# Altium PCB FPv1.3.5.PcbDoc (part 1 of 9)
Units mil, origin at the board's own origin, x right, y up, seen from the top; angles counter-clockwise.
Board outline 3200 x 2100 mil, 4 copper layers (Top Layer, GROUND PLANE, POWER PLANE, Bottom Layer); 98 components, 183 nets, 614 pads, 312 vias.
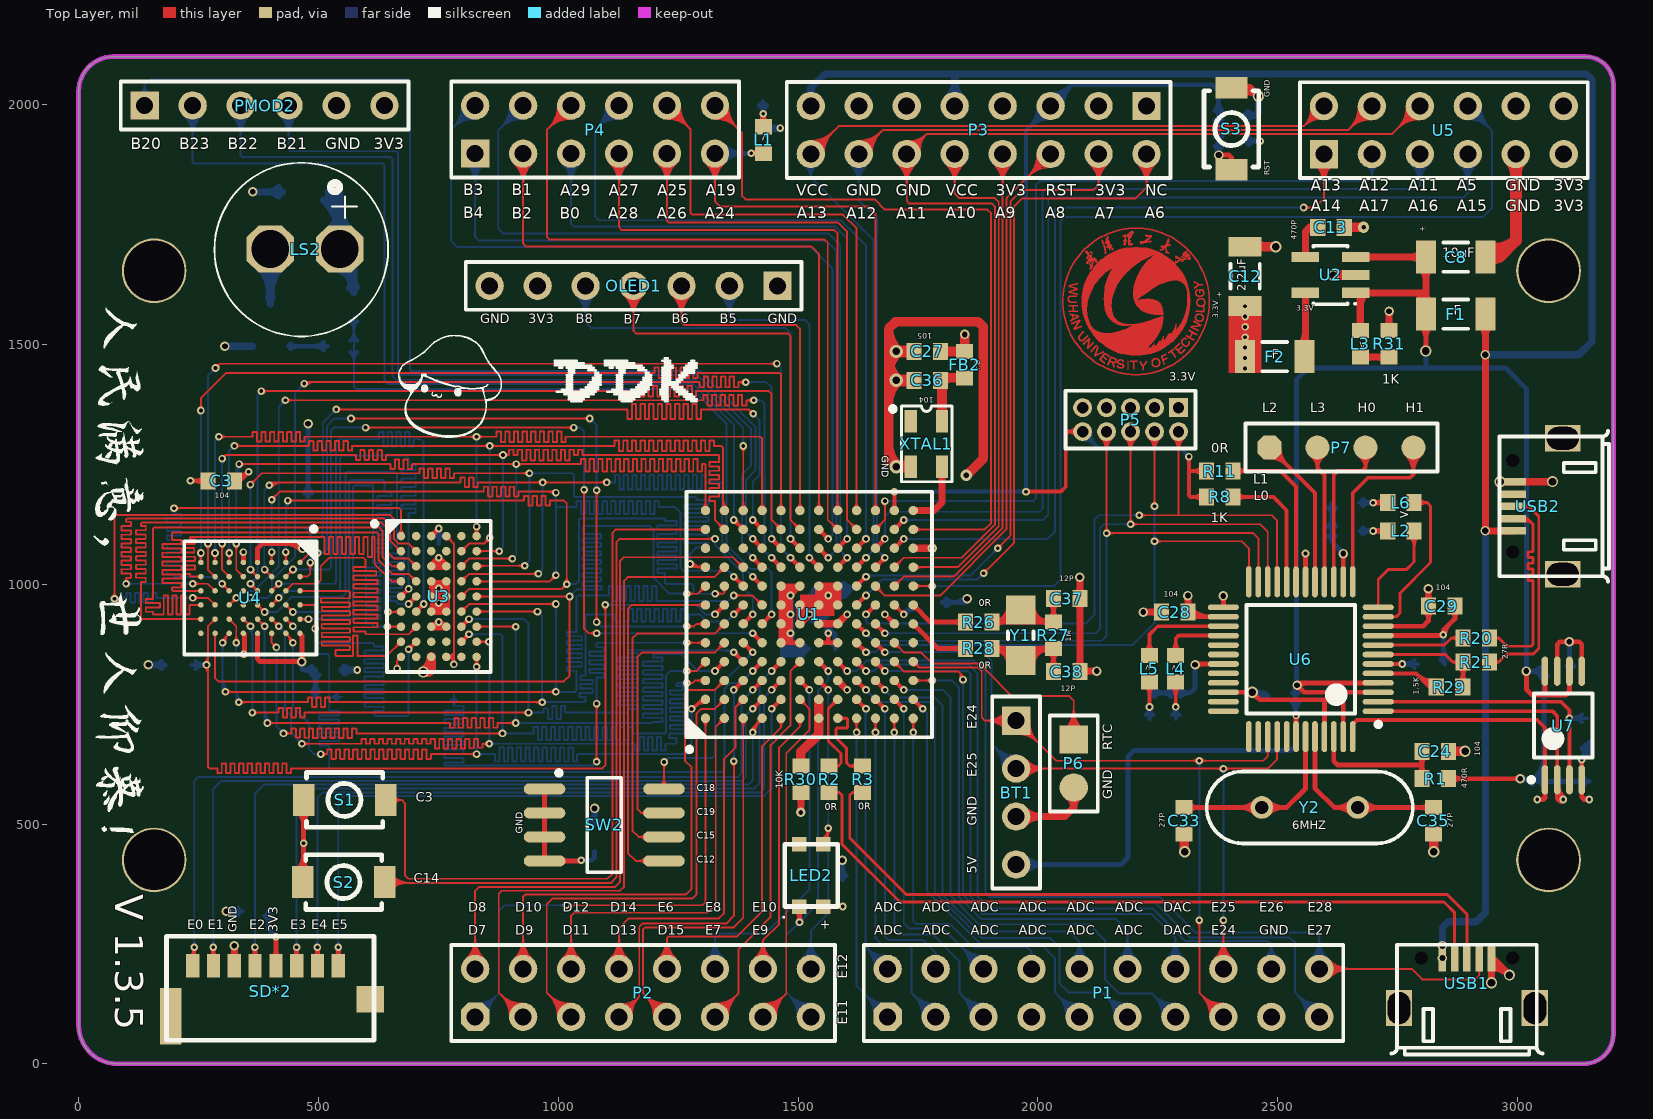
[diagram p0: Top Layer view]
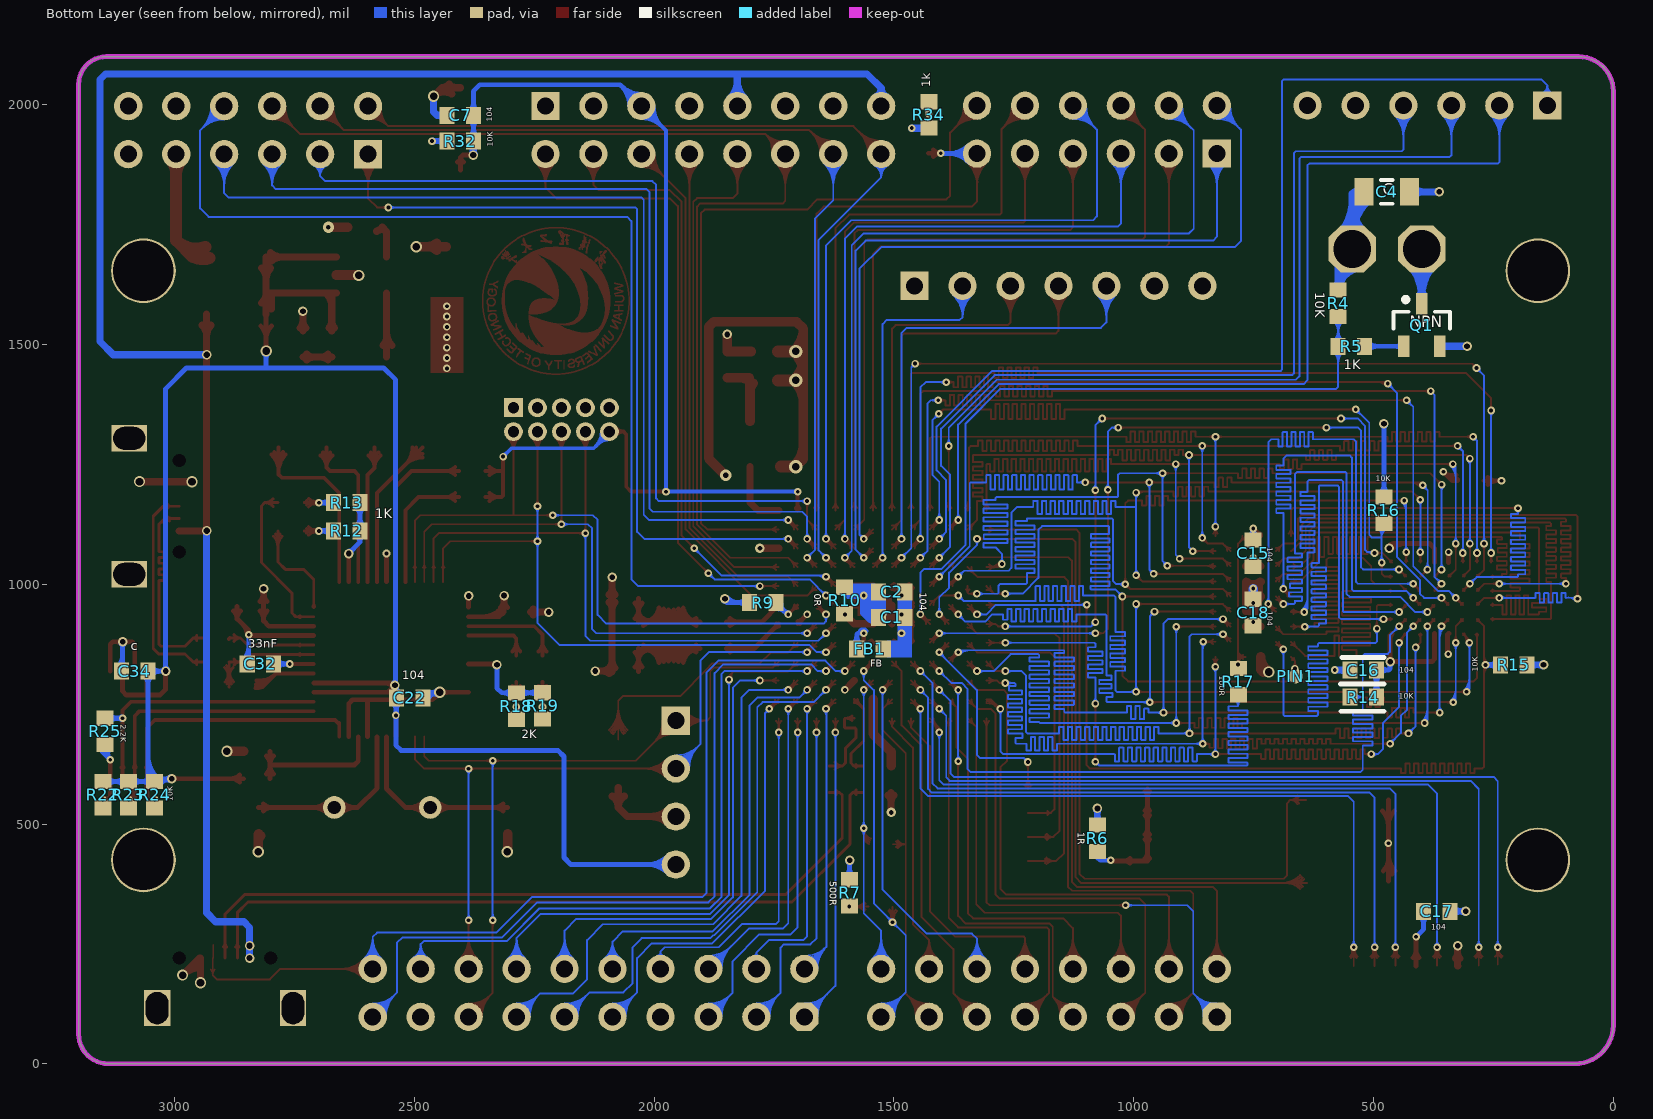
[diagram p1: Bottom Layer view, seen from below]
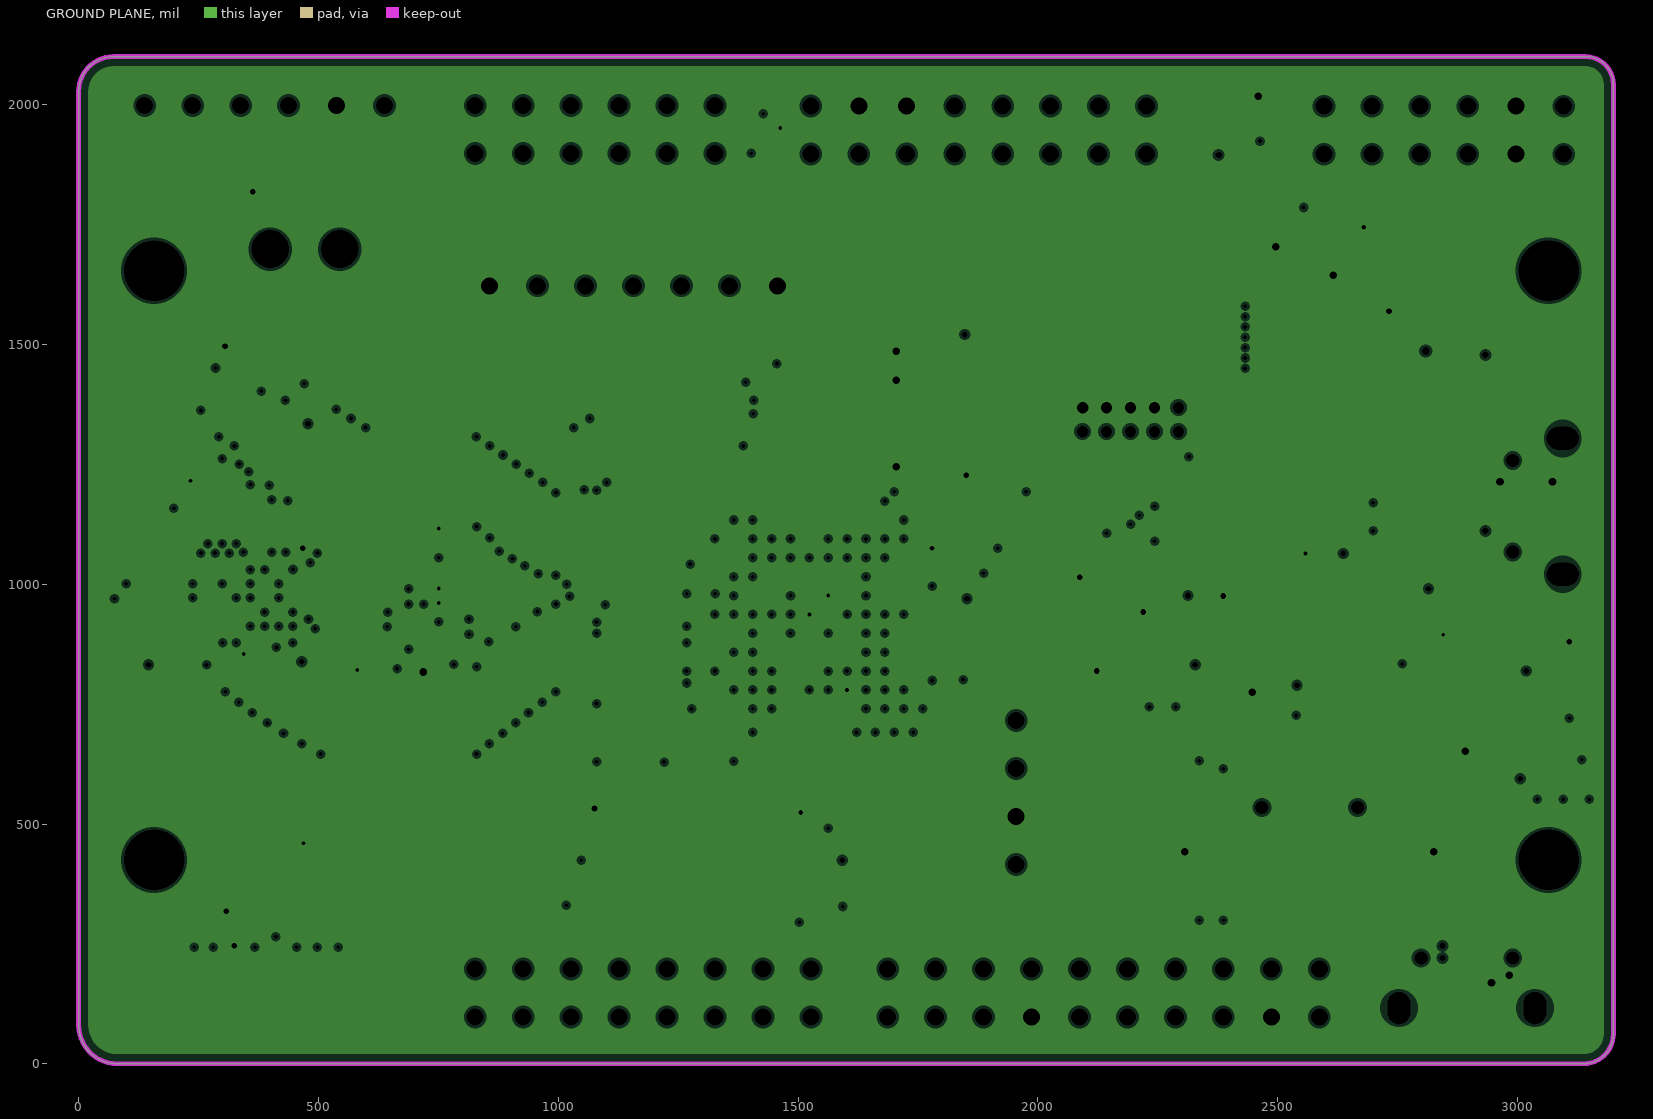
[diagram p2: GROUND PLANE, clearances drawn from the general rule]
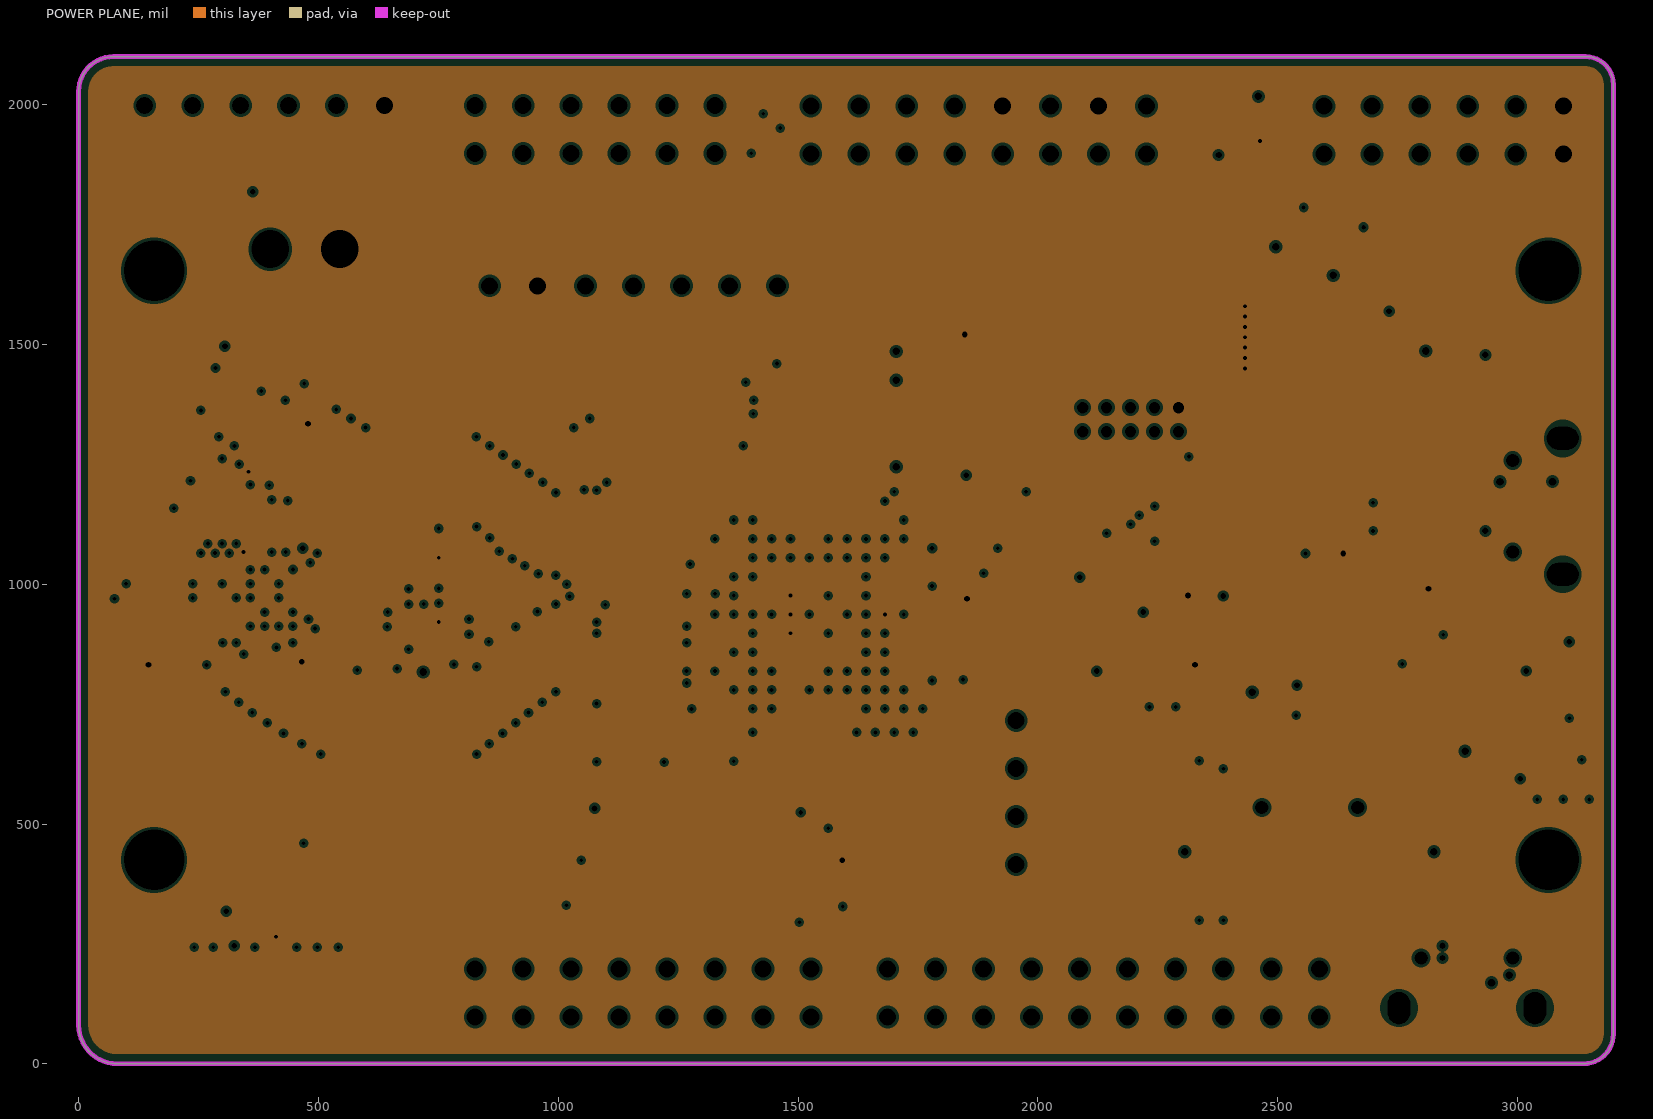
[diagram p3: POWER PLANE, clearances drawn from the general rule]

## Layer stack, top to bottom
Top Layer: signal copper 1.4
Dielectric: prepreg 12.6, FR-4, Dk 4.8
GROUND PLANE: plane copper 1.4, net GND
Dielectric: core 12.6, FR-4, Dk 4.8
POWER PLANE: plane copper 1.4, net 3.3V
Dielectric: prepreg 12.6, FR-4, Dk 4.8
Bottom Layer: signal copper 1.4

## Board outline
0,80.71 0,2027.56 cw(c72.44,2027.56) 72.44,2100 3142.13,2100 cw(c3142.13,2042.13) 3200,2042.13 3200,62.2 cw(c3137.8,62.2) 3137.8,0 80.71,0 cw(c80.71,80.71)

## Design rules (kind name [scope] priority, off if disabled: settings)
Clearance [All] p1: gap=4
DiffPairsRouting [All] p1: maxlimit=100 minlimit=4 mostfreqgap=10 bottomlayer_maxgap=50 maxuncoupledlength=500
HoleSize [All] p1: absolutevalues=TRUE maxlimit=500 minlimit=7.87 maxpercent=80.000 minpercent=20.000
PlaneClearance [All] p1: clearance=6
PlaneConnect PlaneConnect_1 [All] p1: planeconnectstyle=Direct reliefexpansion=4 reliefentries=4 reliefconductorwidth=6 reliefairgap=10
PolygonConnect [All] p1: connectstyle=Direct reliefconductorwidth=10 reliefentries=4 polygonreliefangle="90 Angle" airgapwidth=5
RoutingVias [All] p1: holewidth=28 width=50 viastyle="Through Hole" minholewidth=28 minwidth=50 maxholewidth=28 maxwidth=50
SilkToSilkClearance [All] p1: silktosilkclearance=0
SilkToSolderMaskClearance [IsPad] p1: minsilkscreentomaskgap=0 clearancetoexposedcopper=TRUE
SolderMaskExpansion [All] p1: expansion=4
Width [All] p1: maxlimit=70 minlimit=4 preferedwidth=10 minimp=50.000000 maximp=50.000000 favimp=50.000000
22 further rules are at their usual default settings.

## Classes and differential pairs
net class PTC[19..12]: PTC3 PTC12 PTC13 PTC14 PTC15 PTC18 PTC19
net class PTD[15..7]: PTD7 PTD8 PTD9 PTD10 PTD11 PTD12 PTD13 PTD14 PTD15
net class PTB[23..0]: PTB0 PTB1 PTB2 PTB3 PTB4 PTB5 PTB6 PTB7 PTB8 PTB20 PTB21 PTB22 PTB23
net class PTA[29..11]: PTA4 PTA5 PTA11 PTA12 PTA13 PTA14 PTA15 PTA16 PTA17 PTA24 PTA25 PTA26 PTA27 PTA28 PTA29
net class FTM3_CH[7..1]: FTM3_CH1 FTM3_CH2 FTM3_CH3 FTM3_CH4 FTM3_CH5 FTM3_CH6 FTM3_CH7
net class ANALOG[13..1]: ANALOG1 ANALOG2 ANALOG3 ANALOG4 ANALOG5 ANALOG6 ANALOG7 ANALOG8 ANALOG9 ANALOG10 ANALOG11 ANALOG12 ANALOG13
from-to class SRAM_DATA: AD0(U1-B2:U4-B6) AD1(U1-A2:U4-C5) AD2(U1-A3:U4-C6) AD3(U1-B3:U4-D5) AD4(U1-C3:U4-E5) AD5(U1-C6:U4-F5) AD6(U1-D6:U4-F6) AD7(U1-A7:U4-G6) AD8(U1-B7:U4-B1) AD9(U1-C7:U4-C1) AD10(U1-D7:U4-C2) AD11(U1-A8:U4-D2) AD12(U1-C8:U4-E2) AD13(U1-D8:U4-F2) AD14(U1-B9:U4-F1) AD15(U1-D9:U4-G1) "AD16 (U1-E9 : U4-F4)" AD17(U1-B10:U4-E4) AD18(U1-C10:U4-D3) AD19(U1-D10:U4-H1) AD20(U1-E10:U4-G2)
component class MCU_K64FX: C1 C2 C3 C7 C27 C36 C37 C38 FB1 FB2 P5 P6 R9 R10 R26 R27 R28 R30 R32 S1 S2 S3 U1 XTAL1 Y1
component class Memory: C15 C16 C17 C18 PIN1 R14 R15 R16 R17 U3 U4
component class power_manage: C8 C12 C13 F1 F2 L3 R31 U2
component class protocol1: BT1 C4 L1 LED2 LS2 OLED1 P1 P2 P3 P4 PMOD2 Q1 R2 R3 R4 R5 R6 R7 R34 SD*2 SW2 U5 USB1
component class protocol2: C22 C24 C28 C29 C32 C33 C34 C35 L2 L4 L5 L6 P7 R1 R8 R11 R12 R13 R18 R19 R20 R21 R22 R23 R24 R25 R29 U6 U7 USB2 Y2
net class AD[20..0]: AD0 AD1 AD2 AD3 AD4 AD5 AD6 AD7 AD8 AD9 AD10 AD11 AD12 AD13 AD14 AD15 AD16 AD17 AD18 AD19 AD20
net class PTE[0..28]: PTE0 PTE1 PTE2 PTE3 PTE4 PTE5 PTE24 PTE25 PTE26 PTE27 PTE28
differential pair USB0D: +USB0D_P -USB0D_N
differential pair USB1D: +USB1D_P -USB1D_N
differential pair USBPD: +USBPD_P -USBPD_N
differential pair USB0R: +USB0R_P -USB0R_N

## Components (designator, comment, footprint, x,y, rotation, side; value= is the part's Value field where it differs from the comment)
BT1 "Header 4" HDR1X4#1 1954.72,715.55 r270 top
C1 "Cap" 1608[0603] 1505,931 r180 bottom
C2 "Cap" 1608[0603] 1505,984 r180 bottom
C3 "Cap" 1608[0603] 297.24,1215.55 r0 top
C4 "Cap" C2012 472.44,1817.91 r0 bottom
C7 "Cap" 1608[0603] 2404.53,1977.36 r180 bottom
C8 "Cap Pol1" 1206(2) 2871.06,1682.09 r0 top
C12 "Cap Pol1" 1206(2) 2432.09,1641.73 r90 top
C13 "Cap" 1608[0603] 2611.22,1744.09 r180 top
C15 "Cap" 1608[0603] 750.98,1064.96 r270 bottom
C16 "Cap" 1608[0603] 521.65,820.87 r180 bottom
C17 "Cap" 1608[0603] 368.11,317.91 r0 bottom
C18 "Cap" 1608[0603] 750.98,940.94 r270 bottom
C22 "Cap" 1608[0603] 2509.84,762.8 r0 bottom
C24 "Cap" 1608[0603] 2828.74,651.57 r0 top
C27 "Cap" 1608[0603] 1769.69,1485.24 r0 top
C28 "Cap" 1608[0603] 2285.43,941.93 r0 top
C29 "Cap" 1608[0603] 2842.02,954.18 r180 top
C32 "Cap" 1608[0603] 2820.87,833.66 r0 bottom
C33 "Cap" 1608[0603] 2305.12,506.89 r90 top
C34 "Cap" 1608[0603] 3082.84,818.54 r180 bottom
C35 "Cap" 1608[0603] 2824.8,506.89 r270 top
C36 "Cap" 1608[0603] 1769.69,1425.2 r0 top
C37 "Cap" 1608[0603] 2060.04,970.08 r180 top
C38 "Cap" 1608[0603] 2060.04,817.52 r180 top
F1 "300-500mA" 1206(2) 2871.06,1562.99 r180 top
F2 "300-500mA" 1206(2) 2494.09,1474.41 r180 top
FB1 "Inductor" 1608[0603] 1550,865 r0 bottom
FB2 "Inductor" 1608[0603] 1847.44,1457.68 r270 top
L1 "LED" 1608[0603] 1428.15,1926.18 r90 top
L2 "LED" 1608[0603] 2757,1111 r0 top
L3 "LED" 1608[0603] 2672.24,1500.98 r270 top
L4 "LED" 1608[0603] 2287.4,823.82 r90 top
L5 "LED" 1608[0603] 2232.64,823.98 r90 top
L6 "LED" 1608[0603] 2757,1170 r0 top
LED2 "RGB_LED1206" RGB 1527.56,392.72 r90 top
LS2 "Bell" BZ 464.57,1698.82 r270 top
OLED1 "Header 7" HDR1X7 1457,1622 r180 top
P1 "Header 10X2" HDR2X10 1686.81,97.83 r0 top
P2 "Header 8X2" HDR2X8#1 826.81,97.83 r0 top
P3 "Header 8X2" HDR2X8#2 2226.61,1997.05 r180 top
P4 "Header 6X2" HDR2X6 826.81,1897.83 r0 top
P5 "JTAG" MHDR2X5 2293.31,1368.11 r180 top
P6 "Header 2" HDR1X2 2074.8,676.18 r270 top
P7 "Header 4" HDR1X4#2 2483,1285 r0 top
PIN1 "PIN" PIN 662,808 r180 bottom
PMOD2 "Header 6" HDR1X6 137.8,1998.03 r0 top
Q1 "QNPN" SOT23_N 399.61,1540.35 r90 bottom
R1 "Res" 1608[0603] 2828.74,594.49 r180 top
R2 "Res" 1608[0603] 1564.96,593.5 r270 top
R3 "Res" 1608[0603] 1634.84,593.5 r270 top
R4 "10k" 1608[0603] 573.82,1585.63 r270 bottom
R5 "Res2" 1608[0603] 546.26,1496.06 r0 bottom
R6 "Res2" 1608[0603] 1075.79,470.47 r270 bottom
R7 "Res" 1608[0603] 1592.52,356.3 r90 bottom
R8 "Res" 1608[0603] 2379,1182 r0 top
R9 "Res" 1608[0603] 1773.62,961.61 r180 bottom
R10 "Res" 1608[0603] 1603,966 r270 bottom
R11 "Res" 1608[0603] 2379,1236 r0 top
R12 "Res" 1608[0603] 2641,1111 r180 bottom
R13 "Res" 1608[0603] 2641,1170 r180 bottom
R14 "Res" 1608[0603] 521.65,764.76 r180 bottom
R15 "Res" 1608[0603] 207.68,831.69 r180 bottom
R16 "Res" 1608[0603] 478.35,1154.53 r90 bottom
R17 "Res" 1608[0603] 782,797 r90 bottom
R18 "Res" 1608[0603] 2287.4,745.94 r90 bottom
R19 "Res" 1608[0603] 2232.64,746.1 r90 bottom
R20 "Res" 1608[0603] 2914.37,887.8 r180 top
R21 "Res" 1608[0603] 2914.37,837.6 r180 top
R22 "Res" 1608[0603] 3149.61,561.02 r270 bottom
R23 "Res" 1608[0603] 3096.46,561.02 r270 bottom
R24 "Res" 1608[0603] 3041.34,561.02 r270 bottom
R25 "Res" 1608[0603] 3144.69,692.91 r270 bottom
R26 "Res" 1608[0603] 1877.13,920.94 r180 top
R27 "Res" 1608[0603] 2032.48,893.31 r270 top
R28 "Res" 1608[0603] 1877.13,865.94 r180 top
R29 "Res" 1608[0603] 2858.27,785.43 r180 top
R30 "Res" 1608[0603] 1505.91,593.5 r90 top
R31 "Res" 1608[0603] 2732.28,1500.98 r270 top
R32 "Res" 1608[0603] 2404.29,1923.78 r180 bottom
R34 "Res" 1608[0603] 1427.17,1978.35 r90 bottom
S1 "SW-PB" "key 3*4*2" 554.13,550.2 r180 top
S2 "SW-PB" "key 3*4*2" 552.17,378.94 r180 top
S3 "SW-PB" "key 3*4*2" 2403.54,1948.82 r270 top
SD*2 "TF_card" TF卡座(短体) 183.07,49.21 r0 top
SW2 "SW DIP-4" SOIC-8 1096,498 r0 top
U1 "MK64BGA144" BGA144C100P12X12_1300X1300X161 1523.62,937.01 r90 top
U2 "MIC5219" SOT-23-5 2610.24,1644.69 r90 top
U3 "SN74LVC16373A(BGA54)" BGA54C80P6X9_550X800X120 750.98,974.41 r0 top
U4 "EM7164SU16" BGA48C75P6X8_598X698X104 358.27,971.46 r270 top
U5 "Header 6X2" HDR2X6 2596.46,1896.65 r0 top
U6 "FT2232D" TSQFP50P900X900X160-48N 2548.23,843.5 r180 top
U7 "AT93C46D" TSOP65P640X120-8N-AT93C46D 3095.63,705.35 r90 top
USB1 "USB_5line" USB-MICRO-5P-2F#1 2843.5,220.47 r180 top
USB2 "USB_5line" USB-MICRO-5P-2F#2 2990.16,1111.22 r270 top
XTAL1 "50M有源晶体" XTAL7_3225 1767.72,1292.32 r270 top
Y1 "32.768kHZ" 3215 1964.57,893.31 r270 top
Y2 "6MHz" XTAL-RAD-0.2 2566.93,534.45 r180 top

## Footprints (in the part's own frame and the unit in brackets; to place one, negate y for a bottom-side part, rotate by r counter-clockwise, add the part's x,y. Pads: shape width x height; smd on the part's side, far side on the other; paste and mask are expansions set on the pad)
1206(2) [mm]
  rect 1.05x1.75 smd: 1(-1.575,0) 2(1.575,0)
  silkscreen extent -0.65,-0.77 0.65,0.77, body extent -1.6,-0.8 1.6,0.8, height 1.6
1608[0603] [mm] "Chip Capacitor, Body 1.6x0.8mm, IPC High Density"
  rect 0.8x0.9 smd: 1(-0.7,0) 2(0.7,0)
  body extent -0.87,-0.48 0.87,0.48, height 1.3
3215 [mm]
  rect 1.54x1.55 smd: 1(-1.335,0) 2(1.335,0)
  silkscreen extent -0.2,-0.67 0.2,0.67, body extent -1.65,-0.75 1.65,0.75, height 0.75
BGA48C75P6X8_598X698X104 [mm] "BGA, 48-Leads, Body 5.98x6.98mmx1.04mm, Pitch 0.75mm"
  round 0.29 smd: A1(-1.875,2.625) A2(-1.125,2.625) A3(-0.375,2.625) A4(0.375,2.625) A5(1.125,2.625) A6(1.875,2.625) B1(-1.875,1.875) B2(-1.125,1.875) B3(-0.375,1.875) B4(0.375,1.875) B5(1.125,1.875) B6(1.875,1.875) C1(-1.875,1.125) C2(-1.125,1.125) C3(-0.375,1.125) C4(0.375,1.125) C5(1.125,1.125) C6(1.875,1.125) D1(-1.875,0.375) D2(-1.125,0.375) D3(-0.375,0.375) D4(0.375,0.375) D5(1.125,0.375) D6(1.875,0.375) E1(-1.875,-0.375) E2(-1.125,-0.375) E3(-0.375,-0.375) E4(0.375,-0.375) E5(1.125,-0.375) E6(1.875,-0.375) F1(-1.875,-1.125) F2(-1.125,-1.125) F3(-0.375,-1.125) F4(0.375,-1.125) F5(1.125,-1.125) F6(1.875,-1.125) G1(-1.875,-1.875) G2(-1.125,-1.875) G3(-0.375,-1.875) G4(0.375,-1.875) G5(1.125,-1.875) G6(1.875,-1.875) H1(-1.875,-2.625) H2(-1.125,-2.625) H3(-0.375,-2.625) H4(0.375,-2.625) H5(1.125,-2.625) H6(1.875,-2.625)
  silkscreen extent -3.77,-3.5 3,3.5, body extent -2.99,-3.49 2.99,3.49, height 1.04
BGA54C80P6X9_550X800X120 [mm] "BGA, 54-Leads, Body 5.50x8.00mmx1.20mm, Pitch 0.80mm"
  round 0.45 smd: A1(-2,3.2) A2(-1.2,3.2) A3(-0.4,3.2) A4(0.4,3.2) A5(1.2,3.2) A6(2,3.2) B1(-2,2.4) B2(-1.2,2.4) B3(-0.4,2.4) B4(0.4,2.4) B5(1.2,2.4) B6(2,2.4) C1(-2,1.6) C2(-1.2,1.6) C3(-0.4,1.6) C4(0.4,1.6) C5(1.2,1.6) C6(2,1.6) D1(-2,0.8) D2(-1.2,0.8) D3(-0.4,0.8) D4(0.4,0.8) D5(1.2,0.8) D6(2,0.8) E1(-2,0) E2(-1.2,0) E3(-0.4,0) E4(0.4,0) E5(1.2,0) E6(2,0) F1(-2,-0.8) F2(-1.2,-0.8) F3(-0.4,-0.8) F4(0.4,-0.8) F5(1.2,-0.8) F6(2,-0.8) G1(-2,-1.6) G2(-1.2,-1.6) G3(-0.4,-1.6) G4(0.4,-1.6) G5(1.2,-1.6) G6(2,-1.6) H1(-2,-2.4) H2(-1.2,-2.4) H3(-0.4,-2.4) H4(0.4,-2.4) H5(1.2,-2.4) H6(2,-2.4) J1(-2,-3.2) J2(-1.2,-3.2) J3(-0.4,-3.2) J4(0.4,-3.2) J5(1.2,-3.2) J6(2,-3.2)
  silkscreen extent -3.52,-4 2.75,4, body extent -2.75,-4 2.75,4, height 1.2
BGA144C100P12X12_1300X1300X161 [mm] "BGA, 144-Leads, Body 13.00x13.00mmx1.61mm, Pitch 1.00mm"
  round 0.5 smd: A1(-5.5,5.5) A2(-4.5,5.5) A3(-3.5,5.5) A4(-2.5,5.5) A5(-1.5,5.5) A6(-0.5,5.5) A7(0.5,5.5) A8(1.5,5.5) A9(2.5,5.5) A10(3.5,5.5) A11(4.5,5.5) A12(5.5,5.5) B1(-5.5,4.5) B2(-4.5,4.5) B3(-3.5,4.5) B4(-2.5,4.5) B5(-1.5,4.5) B6(-0.5,4.5) B7(0.5,4.5) B8(1.5,4.5) B9(2.5,4.5) B10(3.5,4.5) B11(4.5,4.5) B12(5.5,4.5) C1(-5.5,3.5) C2(-4.5,3.5) C3(-3.5,3.5) C4(-2.5,3.5) C5(-1.5,3.5) C6(-0.5,3.5) C7(0.5,3.5) C8(1.5,3.5) C9(2.5,3.5) C10(3.5,3.5) C11(4.5,3.5) C12(5.5,3.5) D1(-5.5,2.5) D2(-4.5,2.5) D3(-3.5,2.5) D4(-2.5,2.5) D5(-1.5,2.5) D6(-0.5,2.5) D7(0.5,2.5) D8(1.5,2.5) D9(2.5,2.5) D10(3.5,2.5) D11(4.5,2.5) D12(5.5,2.5) E1(-5.5,1.5) E2(-4.5,1.5) E3(-3.5,1.5) E4(-2.5,1.5) E5(-1.5,1.5) E6(-0.5,1.5) E7(0.5,1.5) E8(1.5,1.5) E9(2.5,1.5) E10(3.5,1.5) E11(4.5,1.5) E12(5.5,1.5) F1(-5.5,0.5) F2(-4.5,0.5) F3(-3.5,0.5) F4(-2.5,0.5) F5(-1.5,0.5) F6(-0.5,0.5) F7(0.5,0.5) F8(1.5,0.5) F9(2.5,0.5) F10(3.5,0.5) F11(4.5,0.5) F12(5.5,0.5) G1(-5.5,-0.5) G2(-4.5,-0.5) G3(-3.5,-0.5) G4(-2.5,-0.5) G5(-1.5,-0.5) G6(-0.5,-0.5) G7(0.5,-0.5) G8(1.5,-0.5) G9(2.5,-0.5) G10(3.5,-0.5) G11(4.5,-0.5) G12(5.5,-0.5) H1(-5.5,-1.5) H2(-4.5,-1.5) H3(-3.5,-1.5) H4(-2.5,-1.5) H5(-1.5,-1.5) H6(-0.5,-1.5) H7(0.5,-1.5) H8(1.5,-1.5) H9(2.5,-1.5) H10(3.5,-1.5) H11(4.5,-1.5) H12(5.5,-1.5) J1(-5.5,-2.5) J2(-4.5,-2.5) J3(-3.5,-2.5) J4(-2.5,-2.5) J5(-1.5,-2.5) J6(-0.5,-2.5) J7(0.5,-2.5) J8(1.5,-2.5) J9(2.5,-2.5) J10(3.5,-2.5) J11(4.5,-2.5) J12(5.5,-2.5) K1(-5.5,-3.5) K2(-4.5,-3.5) K3(-3.5,-3.5) K4(-2.5,-3.5) K5(-1.5,-3.5) K6(-0.5,-3.5) K7(0.5,-3.5) K8(1.5,-3.5) K9(2.5,-3.5) K10(3.5,-3.5) K11(4.5,-3.5) K12(5.5,-3.5) L1(-5.5,-4.5) L2(-4.5,-4.5) L3(-3.5,-4.5) L4(-2.5,-4.5) L5(-1.5,-4.5) L6(-0.5,-4.5) L7(0.5,-4.5) L8(1.5,-4.5) L9(2.5,-4.5) L10(3.5,-4.5) L11(4.5,-4.5) L12(5.5,-4.5) M1(-5.5,-5.5) M2(-4.5,-5.5) M3(-3.5,-5.5) M4(-2.5,-5.5) M5(-1.5,-5.5) M6(-0.5,-5.5) M7(0.5,-5.5) M8(1.5,-5.5) M9(2.5,-5.5) M10(3.5,-5.5) M11(4.5,-5.5) M12(5.5,-5.5)
  silkscreen extent -7.27,-6.5 6.5,6.5, body extent -6.5,-6.5 6.5,6.5, height 1.61
BZ [mm]
  oct 2.5x2.5 hole 2: 1(0,2.032) 2(0,-1.651)
  silkscreen extent -4.57,-4.61 4.62,4.59
C2012 [mm] "Chip Capacitor, 2-Leads, Body 2.0x1.2mm, IPC Low Density"
  rect 1x1.45 smd: 1(-1.2,0) 2(1.2,0)
  silkscreen extent -0.3,-0.63 0.3,0.63, body extent -0.98,-0.6 1.02,0.6, height 0.5
HDR1X2 [mm] "Connector; Header; 2 Position"
  rect 1.5x1.5 smd: 1(0,0)
  round 1.5 smd: 2(2.54,0)
  silkscreen extent -1.27,-1.27 3.81,1.27
HDR1X4#1 [mm] "Connector; Header; 4 Position"
  rect 1.5x1.5 hole 0.9: 1(0,0)
  round 1.5 hole 0.9: 2(2.54,0) 3(5.08,0) 4(7.62,0)
  silkscreen extent -1.27,-1.27 8.89,1.27
HDR1X4#2 [mm] "Connector; Header; 4 Position"
  oct 1.27x1.27 smd: 1(0,0)
  round 1.27 smd: 2(2.54,0) 3(5.08,0) 4(7.62,0)
  silkscreen extent -1.27,-1.27 8.89,1.27
HDR1X6 [mm] "Connector; Header; 6 Position"
  rect 1.5x1.5 hole 0.9: 1(0,0)
  round 1.5 hole 0.9: 2(2.54,0) 3(5.08,0) 4(7.62,0) 5(10.16,0) 6(12.7,0)
  silkscreen extent -1.27,-1.27 13.97,1.27, body extent -1.27,-1.27 13.97,1.27, height 7.58
HDR1X7 [mm] "Connector; Header; 7 Position"
  rect 1.5x1.5 hole 0.9: 1(0,0)
  round 1.5 hole 0.9: 2(2.54,0) 3(5.08,0) 4(7.62,0) 5(10.16,0) 6(12.7,0) 7(15.24,0)
  silkscreen extent -1.27,-1.27 16.51,1.27
HDR2X6 [mm] "Connector; Header; 6x2 Position"
  rect 1.5x1.5 hole 0.9: 1(0,0)
  round 1.5 hole 0.9: 2(0,2.54) 3(2.54,0) 4(2.54,2.54) 5(5.08,0) 6(5.08,2.54) 7(7.62,0) 8(7.62,2.54) 9(10.16,0) 10(10.16,2.54) 11(12.7,0) 12(12.7,2.54)
  silkscreen extent -1.27,-1.27 13.97,3.81, body extent -1.27,-1.27 13.97,3.81, height 7.58
HDR2X8#1 [mm] "Connector; Header; 8x2 Position"
  oct 1.5x1.5 hole 0.9: 1(0,0)
  round 1.5 hole 0.9: 2(0,2.54) 3(2.54,0) 4(2.54,2.54) 5(5.08,0) 6(5.08,2.54) 7(7.62,0) 8(7.62,2.54) 9(10.16,0) 10(10.16,2.54) 11(12.7,0) 12(12.7,2.54) 13(15.24,0) 14(15.24,2.54) 15(17.78,0) 16(17.78,2.54)
  silkscreen extent -1.27,-1.27 19.05,3.81, body extent -1.27,-1.27 19.05,3.81, height 7.58
HDR2X8#2 [mm] "Connector; Header; 8x2 Position"
  rect 1.5x1.5 hole 0.9: 1(0,0)
  round 1.5 hole 0.9: 2(0,2.54) 3(2.54,0) 4(2.54,2.54) 5(5.08,0) 6(5.08,2.54) 7(7.62,0) 8(7.62,2.54) 9(10.16,0) 10(10.16,2.54) 11(12.7,0) 12(12.7,2.54) 13(15.24,0) 14(15.24,2.54) 15(17.78,0) 16(17.78,2.54)
  silkscreen extent -1.27,-1.27 19.05,3.81, body extent -1.27,-1.27 19.05,3.81, height 7.58
HDR2X10 [mm] "Connector; Header; 10x2 Position"
  oct 1.5x1.5 hole 0.9: 1(0,0)
  round 1.5 hole 0.9: 2(0,2.54) 3(2.54,0) 4(2.54,2.54) 5(5.08,0) 6(5.08,2.54) 7(7.62,0) 8(7.62,2.54) 9(10.16,0) 10(10.16,2.54) 11(12.7,0) 12(12.7,2.54) 13(15.24,0) 14(15.24,2.54) 15(17.78,0) 16(17.78,2.54) 17(20.32,0) 18(20.32,2.54) 19(22.86,0) 20(22.86,2.54)
  silkscreen extent -1.27,-1.27 24.13,3.81, body extent -1.27,-1.27 24.13,3.81, height 7.58
"key 3*4*2" [mm]
  rect 1.15x1.7 smd: 1(-2.191,0) 2(2.159,0)
  silkscreen extent -2.03,-1.45 2,1.45
MHDR2X5 [mm] "Connector; Header; 5x2 Position"
  rect 1x1 hole 0.6: 1(0,0)
  round 1 hole 0.6: 2(0,1.27) 3(1.27,0) 4(1.27,1.27) 5(2.54,0) 6(2.54,1.27) 7(3.81,0) 8(3.81,1.27) 9(5.08,0) 10(5.08,1.27)
  silkscreen extent -0.9,-0.9 5.98,2.17
PIN [mil]
  round 30 smd: 1(0,0)
RGB [mil]
  rect 30x30 smd: 1(-65,25) 2(-65,-25) 3(65,-25) 4(65,25)
  silkscreen extent -90,-55 65,60
SOIC-8 [mm] "IOS1540\1"
  oval 2.2x0.6 smd: 1(-3.162,1.905) 2(-3.162,0.635) 3(-3.162,-0.635) 4(-3.162,-1.905) 5(3.162,-1.905) 6(3.162,-0.635) 7(3.162,0.635) 8(3.162,1.905)
  silkscreen extent -2.52,-2.5 0.9,2.88, body extent -2,-2.5 2,2.5, height 1.75
SOT23_N [mm] "SOT23, 3-Leads, Body 2.9x1.3mm, Pitch 0.95mm, Lead Span 2.3mm - Reverse Pinning, IPC Medium Density"
  rect 1.15x0.6 smd: 1(1.125,0) 2(-1.125,-0.95) 3(-1.125,0.95)
  silkscreen extent -0.2,-1.5 1.47,1.5, body extent -0.7,-1.5 0.7,1.5, height 1.1
SOT-23-5 [mm] "SOT-23/SC-74A; 5 Leads; Body 3.1 x 3 mm, inc. leads (LxW max)"
  rect 0.55x1.45 smd: 1(-0.95,-1.329) 2(0,-1.329) 3(0.95,-1.329) 4(0.95,1.329) 5(-0.95,1.329)
  silkscreen extent -1.57,-1.35 1.55,0.9
TF卡座(短体) [mm]
  rect 1.15x3 smd: 0(0.227,1.27)
  rect 1.48x1.4 smd: 0(10.795,2.159)
  rect 0.7x1.25 smd: 1(9.097,3.937) 2(7.997,3.937) 3(6.897,3.937) 4(5.797,3.937) 5(4.697,3.937) 6(3.597,3.937) 7(2.497,3.937) 8(1.397,3.937)
  silkscreen extent 0,0 11,5.5
TSOP65P640X120-8N-AT93C46D [mm] "TSOP, 8-Leads, Body 3.00x4.40mm, Pitch 0.65mm, IPC Medium Density"
  oval 1.55x0.35 smd: 1(-2.875,0.975) 2(-2.875,0.325) 3(-2.875,-0.325) 4(-2.875,-0.975) 5(2.875,-0.975) 6(2.875,-0.325) 7(2.875,0.325) 8(2.875,0.975)
  silkscreen extent -3,-1.55 1.7,1.82, body extent -2.25,-1.55 2.25,1.55, height 1.2
TSQFP50P900X900X160-48N [mm] "TSQFP, 48-Leads,FTDI FT2232D"
  oval 1.65x0.3 smd: 1(-4.1,2.75) 2(-4.1,2.25) 3(-4.1,1.75) 4(-4.1,1.25) 5(-4.1,0.75) 6(-4.1,0.25) 7(-4.1,-0.25) 8(-4.1,-0.75) 9(-4.1,-1.25) 10(-4.1,-1.75) 11(-4.1,-2.25) 12(-4.1,-2.75) 25(4.1,-2.75) 26(4.1,-2.25) 27(4.1,-1.75) 28(4.1,-1.25) 29(4.1,-0.75) 30(4.1,-0.25) 31(4.1,0.25) 32(4.1,0.75) 33(4.1,1.25) 34(4.1,1.75) 35(4.1,2.25) 36(4.1,2.75)
  oval 0.3x1.65 smd: 13(-2.75,-4.1) 14(-2.25,-4.1) 15(-1.75,-4.1) 16(-1.25,-4.1) 17(-0.75,-4.1) 18(-0.25,-4.1) 19(0.25,-4.1) 20(0.75,-4.1) 21(1.25,-4.1) 22(1.75,-4.1) 23(2.25,-4.1) 24(2.75,-4.1) 37(2.75,4.1) 38(2.25,4.1) 39(1.75,4.1) 40(1.25,4.1) 41(0.75,4.1) 42(0.25,4.1) 43(-0.25,4.1) 44(-0.75,4.1) 45(-1.25,4.1) 46(-1.75,4.1) 47(-2.25,4.1) 48(-2.75,4.1)
  silkscreen extent -4.23,-2.88 2.88,3.57, body extent -3.5,-3.5 3.5,3.5, height 1.6
USB-MICRO-5P-2F#1 [mm]
  round 0 hole 0.7: 0(-3.725,0) 0(1.125,0)
  rect 0.4x1.4 smd: 1(0,0) 2(-0.65,0) 3(-1.3,0) 4(-1.95,0) 5(-2.6,0)
  rect 1.4x1.9 hole 1.2 slot 1.7 at 90 deg: 6(2.3,2.65) 7(-4.9,2.65)
  silkscreen extent -5.3,-0.7 2.7,5.1
USB-MICRO-5P-2F#2 [mm]
  round 0 hole 0.7 mask+0.051: 0(-3.725,0) 0(1.125,0)
  rect 0.4x1.4 smd: 1(0,0) 2(-0.65,0) 3(-1.3,0) 4(-1.95,0) 5(-2.6,0)
  rect 1.4x1.9 hole 1.2 slot 1.7 at 90 deg: 6(2.3,2.65) 7(-4.9,2.65)
  silkscreen extent -5.3,-0.7 2.7,5.1
XTAL7_3225 [mil]
  rect 47.2x25.6 smd: 1(-47.25,-32.5) 2(47.25,-32.5) 3(47.25,32.5) 4(-47.25,32.5)
  silkscreen extent -79,-75 79,53
XTAL-RAD-0.2 [mm] "Radial Cap, Thru-Hole; 2 Leads; 0.2 in Pin Spacing"
  round 1.2 hole 0.7: 1(-2.54,0) 2(2.54,0)
  silkscreen extent -5.46,-1.91 5.46,1.91, body extent -5.33,-2.05 5.33,2.05, height 3.22

## Part data
BT1 P7: "Header, 4-Pin"
C1 C2 C3 C7 C13 C15 C16 C17 C18 C22 C24 C27 C28 C29 C32 C33 C34 C35 C36 C37 C38: "贴片电容"
C4: "Capacitor"
C8 C12: "Polarized Capacitor (Radial)"
F1 F2: library part "Fuse 1", "Fuse"
LS2: "Electrical Bell"
OLED1: "Header, 7-Pin"
P1: "Header, 10-Pin, Dual row"
P2 P3: "Header, 8-Pin, Dual row"
P4 U5: "Header, 6-Pin, Dual row"
P5: library part "Header 5X2", "Header, 5-Pin, Dual row"
P6: "Header, 2-Pin"
PMOD2: "Header, 6-Pin"
Q1: "NPN Bipolar Transistor"
R1 R2 R3 R7 R8 R9 R10 R11 R12 R13 R14 R15 R16 R17 R18 R19 R20 R21 R22 R23 R24 R25 R26 R27 R28 R29 R30 R31 R32 R34: "贴片电阻"
R4: library part Res, "Resistor of led"
R5 R6: "Resistor"
S1 S2 S3: "Switch"
SW2: "DIP Switch, 4 Position, SPST"
U2: "LDO"
XTAL1: library part 有源晶体
Y1 Y2: library part XTAL, "晶体振荡器"

## Free pads (board coordinates)
  round 135 hole 125.98: 0(3064.96,425.2) 1(157.48,425.2) 2(157.48,1653.54) 3(3064.96,1653.54)

## Via types
v1: diameter 15.87, hole 7.87, Top Layer to Bottom Layer, tented both sides, 261 vias
v2: diameter 19.8, hole 11.81, Top Layer to Bottom Layer, tented both sides, 25 vias
v3: diameter 23.62, hole 15.75, Top Layer to Bottom Layer, tented both sides, 11 vias
v4: diameter 20, hole 13, Top Layer to Bottom Layer, tented both sides, 5 vias
v5: diameter 27.68, hole 15.75, Top Layer to Bottom Layer, tented both sides, 3 vias
v6: diameter 23.74, hole 15.75, Top Layer to Bottom Layer, tented both sides, 2 vias
v7: diameter 19.8, hole 9.84, Top Layer to Bottom Layer, tented both sides, 2 vias
v8: diameter 23.62, hole 9.45, Top Layer to Bottom Layer, tented both sides, 1 vias
v9: diameter 17.24, hole 9.06, Top Layer to Bottom Layer, tented both sides, 1 vias
v10: diameter 23.74, hole 11.81, Top Layer to Bottom Layer, tented both sides, 1 vias

## Nets (pads, with @x,y where several pads share a name; then routed paths per layer and width w, separated by ;. In a path a pad name is that pad's centre, name@x,y a point inside that pad or via, vN(x,y) a via of type N, cw(c..) or ccw(c..) an arc to the next point about the centre after c; other vN are vias at no path point)
3.3V: C1.2 C2.2 C3.2 C4.2 C12.1 C15.2 C16.2 C17.2 C18.2 C27.2 C28.2 C29.2 F2.2 FB1.1 FB2.1 LS2.1 OLED1.6 P3.3 P3.7 P5.1 PMOD2.6 R4.1 R7.2 R9.1 R12.2 R13.2 R14.2 R15.2 R16.2 R18.2 R19.2 R32.1 SD*2.4 U1.E5 U1.E6 U1.E7 U1.E8 U1.F5 U1.F8 U1.L6 U3.C3 U3.C4 U3.G3 U3.G4 U4.A6 U4.D6 U4.E1 U5.11 U5.12 U6.10 U6.14 U6.26 U6.31 | length 5312.8
  Top Layer w10: C3.2@324.8,1215.55 335.63,1215.55 v1(354.33,1234.25) cw(c335.82,1252.76) C3.2@328.01,1227.78 ; C3.2@325.03,1218.23 ccw(c330.26,1234.96) 342.65,1222.57 ; U4.E1@343.5,1045.28 v1(343.5,1066.93) ; U4.D6@373.03,897.64 373.03,843.5 377.95,838.58 v2(465.55,838.58) 465.55,893.7 U4.A6@461.61,897.64 ; SD*2.4@405.09,221.25 ccw(c390.1,236.24) 411.3,236.24 ccw(c432.49,236.24) SD*2.4@417.51,221.25 ; SD*2.4@411.3,204.21 v1@411.3,264.65 ; U4.A6@461.11,897.14 cw(c450.4,886.42) 465.55,886.42 ; v2@462.09,835.12 ccw(c453.72,826.75) 453.72,838.58 ccw(c453.72,850.42) 462.09,842.05 ccw(c453.72,850.42) 465.55,850.42 ccw(c477.38,850.42) v2@469.02,842.05 ; U1.E5@1461.14,881.38 ccw(c1452.88,889.64) 1464.57,889.64 ccw(c1476.26,889.64) 1467.99,881.38 ccw(c1476.26,889.64) 1476.26,877.95 ccw(c1476.26,866.26) U1.E5@1467.99,874.53 ; U1.E6@1461.14,913.9 cw(c1452.88,905.63) 1464.57,905.63 cw(c1476.26,905.63) U1.E6@1467.99,913.9 ; U1.E6@1461.14,920.75 ccw(c1452.88,929.01) 1464.57,929.01 ccw(c1476.26,929.01) U1.E6@1467.99,920.75 ; U1.E7@1461.14,953.27 cw(c1452.88,945) 1464.57,945 cw(c1476.26,945) 1467.99,953.27 cw(c1476.26,945) 1476.26,956.69 cw(c1476.26,968.38) 1467.99,960.12 cw(c1476.26,968.38) 1464.57,968.38 cw(c1452.88,968.38) U1.E7@1461.14,960.12 ; U1.E8@1461.14,992.64 cw(c1452.88,984.37) 1464.57,984.37 cw(c1476.26,984.37) 1467.99,992.64 cw(c1476.26,984.37) 1476.26,996.06 cw(c1476.26,1007.75) U1.E8@1467.99,999.49 ; U1.E5@1464.57,882.8 ccw(c1464.57,894.49) 1472.83,886.22 ccw(c1481.1,877.95) U1.E5@1469.41,877.95 ; U1.E6@1464.57,912.48 cw(c1464.57,900.79) 1472.83,909.06 cw(c1481.1,917.32) 1469.41,917.32 cw(c1481.1,917.32) 1472.83,925.59 cw(c1464.57,933.86) U1.E6@1464.57,922.17 ; U1.E7@1464.57,951.85 cw(c1464.57,940.16) 1472.83,948.43 cw(c1481.1,956.69) 1469.41,956.69 cw(c1481.1,956.69) 1472.83,964.96 cw(c1464.57,973.23) U1.E7@1464.57,961.54 ; U1.E8@1464.57,991.22 cw(c1464.57,979.53) 1472.83,987.8 cw(c1481.1,996.06) U1.E8@1469.41,996.06 ; 1464.94,976.38 v1(1484.25,976.38) ; 1465.57,937.01 v1(1484.25,937.01) ; 1483.94,956.69 U1.E7@1464.57,956.69 ; 1484.25,878.2 v1(1484.25,897.64) ; U1.F8@1499.09,996.06 cw(c1487.4,996.06) 1495.67,987.8 cw(c1503.94,979.53) U1.F8@1503.94,991.22 ; U1.F5@1500.51,874.53 ccw(c1492.25,866.26) 1492.25,877.95 ccw(c1492.25,889.64) U1.F5@1500.51,881.38 ; U1.F8@1500.51,992.64 ccw(c1492.25,984.37) 1492.25,996.06 ccw(c1492.25,1007.75) U1.F8@1500.51,999.49 ; U1.F5@1503.94,877.95 U1.E5@1464.57,877.95 ; v1(1681.1,937.01) U1.L6@1700.79,917.32 ; U1.L6@1695.94,917.32 ccw(c1684.25,917.32) 1692.52,925.59 ccw(c1700.79,933.86) U1.L6@1700.79,922.17 ; C28.2@2305.39,951.5 ccw(c2287.04,969.85) 2312.99,969.85 ccw(c2338.94,969.85) C28.2@2320.59,951.5 ; v2@2308.75,973.93 cw(c2293.5,965.12) 2310.51,960.57 ; v2@2309.53,972.91 cw(c2301.16,964.54) 2312.99,964.54 cw(c2324.83,964.54) v2@2316.46,972.91 ; C28.2@2312.99,941.93 v2(2312.99,976.38) ; C28.2@2313.52,940.49 ccw(c2333.81,960.78) 2333.81,932.09 ; 2315.48,960.57 cw(c2332.48,965.12) v2@2317.24,973.93 ; C28.2@2320.59,947.56 ccw(c2357.95,984.92) U6.26@2357.95,932.09 ; C28.2@2322.83,932.09 U6.26@2386.81,932.09 ; v2(2327.76,831.69) 2329.72,833.66 U6.31@2386.81,833.66 ; v2@2331.22,828.23 cw(c2344.34,815.11) 2344.34,833.66 ; v2@2633.35,1060.51 cw(c2624.98,1052.14) 2636.81,1052.14 cw(c2648.64,1052.14) v2@2640.28,1060.51 ; U6.14@2636.81,1004.92 v2(2636.81,1063.98) ; U6.10@2709.65,912.4 2803.4,912.4 2814.46,923.46 v2(2814.46,990.6) ; C29.2@2806.86,944.61 cw(c2788.52,926.26) 2814.46,926.26 cw(c2840.41,926.26) C29.2@2822.06,944.61 ; C29.2@2806.86,963.75 ccw(c2788.52,982.1) 2814.46,982.1 ccw(c2840.41,982.1) C29.2@2822.06,963.75 ; v2@2810.22,988.15 cw(c2793.47,978.48) 2812.15,973.47 ; v2@2811,987.13 cw(c2802.63,978.77) 2814.46,978.77 cw(c2826.3,978.77) v2@2817.93,987.13 ; 2816.78,973.47 cw(c2835.46,978.48) v2@2818.71,988.15 ; U1.E5@1464.57,877.95 U1.E6@1464.57,917.32 ; U1.E5@1464.57,877.95 v1(1484.25,897.64) ; U1.E6@1464.57,917.32 v1(1484.25,937.01) ; U1.E6@1464.57,917.32 U1.E7@1464.57,956.69 ; U1.E6@1464.57,917.32 v1(1484.25,897.64) ; U1.E7@1464.57,956.69 U1.E8@1464.57,996.06 ; U1.E7@1464.57,956.69 v1(1484.25,937.01) ; U1.E7@1464.57,956.69 v1(1484.25,976.38) ; U1.E8@1464.57,996.06 v1(1484.25,976.38) ; U1.E8@1464.57,996.06 1482,996.06 ; 1482,996.06 1484.25,993.81 v1(1484.25,976.38) ; 1482,996.06 U1.F8@1503.94,996.06 v1(1484.25,976.38) ; v1(1484.25,897.64) v1(1484.25,937.01) ; v1(1484.25,937.01) v1(1484.25,976.38)
  Top Layer w15: U3.G3@735.24,912.78 ccw(c735.24,930.31) v1@747.64,917.91 ; v1@750.59,921.43 cw(c735.24,928.19) U3.G3@735.24,911.42 U3.G3@741.14,911.42 ; 750.98,912.43 v1(750.98,921.26) ; 750.98,1038.42 v1@750.98,1053.15 ; v1(750.98,1055.12) v1@750.98,1053.15 ; v1@751.38,921.43 ccw(c766.73,928.19) U3.G4@766.73,911.42 U3.G4@760.83,911.42 ; v1@754.33,917.91 ccw(c766.73,930.31) U3.G4@766.73,912.78 ; F2.2@2422.77,1497.5 ccw(c2400.29,1519.98) 2432.09,1519.98 ccw(c2463.88,1519.98) F2.2@2441.4,1497.5 ; C12.1@2422.77,1570.41 cw(c2400.29,1547.93) 2432.09,1547.93 cw(c2463.88,1547.93) C12.1@2441.4,1570.41 ; F2.2@2428.16,1506.24 cw(c2440.27,1505.31) v1@2432.37,1514.53 ; v1@2428.42,1509.56 ccw(c2442.57,1504.58) F2.2@2432.38,1493.56 ; F2.2@2431.79,1493.56 ccw(c2421.6,1504.58) v1@2435.76,1509.56 ; v1@2431.8,1514.53 cw(c2423.9,1505.31) F2.2@2436.01,1506.24 ; F2.2@2432.09,1474.41 v1(2432.09,1579.72) ; U3.G3@741.14,911.42 U3.G4@760.83,911.42 ; U3.G3@741.14,911.42 v1(750.98,921.26) ; v1(750.98,921.26) U3.G4@760.83,911.42 ; v1@750.98,1053.15 U3.C4@766.73,1037.4 U3.C3@735.24,1037.4 v1@750.98,1053.15
  Top Layer w20: C27.2@1797.24,1485.24 FB2.1@1847.44,1485.24 v2(1847.44,1520.67)
  Bottom Layer w10: v2(145.67,831.69) R15.2@180.12,831.69 ; v2@148.12,827.45 cw(c157.79,810.69) 162.8,829.38 ; v2@148.12,835.94 ccw(c157.79,852.69) 162.8,834.01 ; v2@149.14,828.23 cw(c157.5,819.86) 157.5,831.69 cw(c157.5,843.53) v2@149.14,835.16 ; R15.2@172.52,824.09 ccw(c154.17,805.74) 154.17,831.69 ccw(c154.17,857.64) R15.2@172.52,839.29 ; C17.2@388.07,308.34 cw(c369.72,290) 395.67,290 cw(c421.62,290) C17.2@403.27,308.34 ; C17.2@395.67,317.91 395.67,280.51 v1(411.42,264.76) ; v2@462.09,835.12 cw(c453.72,826.75) 465.55,826.75 cw(c477.38,826.75) v2@469.02,835.12 ; v2(465.55,838.58) 465.55,823.82 468.5,820.87 ; R16.2@470.75,1189.69 ccw(c452.4,1208.03) 478.35,1208.03 ccw(c504.29,1208.03) R16.2@485.95,1189.69 ; v2@474.88,1331.18 cw(c466.51,1322.81) 478.35,1322.81 cw(c490.18,1322.81) v2@481.81,1331.18 ; R16.2@478.35,1182.09 v2(478.35,1334.65) ; C16.2@486.42,813.34 ccw(c468.51,795.78) 468.51,820.87 ; C16.2@486.42,828.39 cw(c468.51,845.95) 468.51,820.87 ; R14.2@486.49,774.33 ccw(c468.15,792.68) 494.09,792.68 ccw(c520.04,792.68) R14.2@501.69,774.33 ; C16.2@486.49,811.3 cw(c468.15,792.95) 494.09,792.95 cw(c520.04,792.95) C16.2@501.69,811.3 ; R14.2@494.09,764.76 C16.2@494.09,820.87 468.5,820.87 ; v1(1484.25,897.64) 1484.25,871.75 1491,865 FB1.1@1522.44,865 ; FB1.1@1514.84,857.4 ccw(c1496.49,839.05) 1496.49,865 ccw(c1496.49,890.95) FB1.1@1514.84,872.6 ; R7.2@1584.92,391.46 ccw(c1566.57,409.81) 1592.52,409.81 ccw(c1618.47,409.81) R7.2@1600.12,391.46 ; v2@1589.05,420.75 cw(c1580.69,412.38) 1592.52,412.38 cw(c1604.35,412.38) v2@1595.99,420.75 ; R7.2@1592.52,383.86 v2(1592.52,424.21) ; R9.1@1801.18,961.61 1844.49,961.61 v2(1852.36,969.49) ; R9.1@1808.78,954.01 cw(c1827.13,935.67) 1827.13,961.61 cw(c1827.13,987.56) R9.1@1808.78,969.21 ; 1821.52,961.61 ccw(c1821.52,1000.33) v2@1848.9,972.95 ; 1845.66,961.61 ccw(c1845.66,976.19) v2@1855.97,965.88 ; R19.2@2232.64,773.66 2287.24,773.66 R18.2@2287.4,773.5 2317.8,773.5 2327.76,783.46 v2(2327.76,831.69) ; R19.2@2242.21,766.06 cw(c2260.55,747.71) 2260.55,773.66 cw(c2260.55,799.61) R19.2@2242.21,781.26 ; 2259.1,773.66 cw(c2259.1,747.17) R18.2@2277.83,765.9 ; 2259.87,773.66 ccw(c2259.87,799.07) R18.2@2277.83,781.1 ; R18.2@2296.97,765.9 cw(c2315.32,747.56) 2315.32,773.5 cw(c2315.32,799.45) R18.2@2296.97,781.1 ; v2@2324.29,828.23 cw(c2315.92,819.86) 2327.76,819.86 cw(c2339.59,819.86) v2@2331.22,828.23 ; R32.1@2431.85,1923.78 v1(2463.22,1923.78) ; R32.1@2439.45,1916.18 cw(c2457.8,1897.83) 2457.8,1923.78 cw(c2457.8,1949.73) R32.1@2439.45,1931.38 ; 2452.74,1922.43 cw(c2455.82,1910.96) v1@2461.75,1921.24 ; 2452.74,1925.13 ccw(c2455.82,1936.6) v1@2461.75,1926.32 ; R12.2@2605.84,1120.57 ccw(c2587.49,1138.92) 2613.44,1138.92 ccw(c2639.39,1138.92) R12.2@2621.04,1120.57 ; R13.2@2605.84,1160.43 cw(c2587.49,1142.08) 2613.44,1142.08 cw(c2639.39,1142.08) R13.2@2621.04,1160.43 ; R12.2@2606.93,1100.48 cw(c2596.94,1087.35) 2613.44,1087.35 ; R13.2@2613.44,1170 R12.2@2613.44,1111 2613.44,1087.35 ; R12.2@2619.95,1100.48 ccw(c2629.94,1087.35) 2613.44,1087.35 ; v2@2631.91,1063.98 ccw(c2620.08,1063.98) 2628.44,1072.34 ccw(c2636.81,1080.71) v2@2636.81,1068.88 ; v2(2636.81,1063.98) 2613.44,1087.35
  Bottom Layer w15: C4.2@511.07,1800.44 cw(c430.2,1719.57) LS2.1@544.57,1719.57 ; LS2.1@515.07,1728.31 ccw(c443.86,1799.52) 544.57,1799.52 ccw(c645.27,1799.52) LS2.1@574.06,1728.31 ; C4.2@519.68,1817.91 541.09,1817.91 ; C4.2@521.68,1811.05 cw(c466.41,1755.78) 544.57,1755.78 ; LS2.1@525.68,1717.71 ccw(c480.08,1763.31) 544.57,1763.31 ccw(c609.06,1763.31) LS2.1@563.46,1717.71 ; C4.2@530.16,1811.69 cw(c541.09,1805.21) 541.09,1817.91 ; C4.2@530.16,1824.13 ccw(c541.09,1830.61) 541.09,1817.91 ; C4.2@532.28,1821.65 cw(c502.62,1791.99) 544.57,1791.99 ; LS2.1@534.63,1658.31 cw(c522.36,1608.33) R4.1@573.82,1608.33 ; LS2.1@538.2,1672.88 cw(c527.06,1627.46) R4.1@573.82,1627.46 ; LS2.1@541.78,1687.44 cw(c531.75,1646.59) 573.82,1646.59 ; R4.1@564.88,1617.59 ccw(c548.46,1627.96) 567.21,1632.98 ; R4.1@565.35,1618.26 ccw(c544.4,1634.6) 570.06,1641.48 ; 567.72,1631.09 ccw(c584.83,1635.67) R4.1@575.97,1620.33 ; R4.1@567.99,1619.02 ccw(c553.91,1633.1) 573.82,1633.1 ccw(c593.73,1633.1) R4.1@579.65,1619.02 ; R4.1@573.82,1613.19 573.82,1669.57 LS2.1@544.57,1698.82 544.57,1814.43 541.09,1817.91
  other v1: 2432.09,1450 2432.09,1471.62 2432.09,1493.24 2432.09,1514.86 2432.09,1536.48 2432.09,1558.1
5V: BT1.4 C8.1 C22.2 C34.2 F1.2 L3.1 R1.1 R22.1 R23.1 R24.1 U2.1 U2.3 U6.3 U6.4 U6.42 U7.6 U7.8 | length 5632.3
  Top Layer w10: U6.42@2538.39,682.09 v1(2538.39,726.38) ; v2@2540.35,784.47 cw(c2540.35,772.64) 2548.72,781 cw(c2557.09,789.37) v2@2545.26,789.37 ; v2@2543.82,785.9 cw(c2564.07,765.66) 2564.07,794.29 ; U6.3@2709.65,774.61 2555.12,774.61 v2(2540.35,789.37) 2545.28,794.29 U6.4@2709.65,794.29 ; F1.2@2797.98,1538.13 cw(c2771.23,1511.38) 2809.06,1511.38 cw(c2846.88,1511.38) F1.2@2820.13,1538.13 ; v6@2804.2,1491.08 ccw(c2792.47,1502.81) 2809.06,1502.81 ccw(c2825.64,1502.81) v6@2813.91,1491.08 ; v6(2809.06,1486.22) F1.2@2809.06,1562.99 ; R1.1@2856.3,594.49 v2(3005.91,594.49) ; R1.1@2863.9,586.89 cw(c2882.25,568.54) 2882.25,594.49 cw(c2882.25,620.44) R1.1@2863.9,602.09 ; v2@3002.44,591.02 ccw(c2994.07,582.65) 2994.07,594.49 ccw(c2994.07,606.32) v2@3002.44,597.95 ; v2@3014.53,815.53 cw(c3004.82,805.82) 3018.56,805.82 ; 3018.56,808.52 cw(c3028.48,808.52) v2@3021.47,815.53 ; v2@3018.56,819 3018.56,780.65 3030.51,768.7 3100.39,768.7 3108.43,776.73 U7.6@3108.43,818.54 ; 3057.24,768.7 U7.8@3057.24,818.54
  Top Layer w15: U2.1@2662.56,1607.28 2798.23,1607.28 ; U2.3@2662.56,1682.09 C8.1@2809.06,1682.09 2809.06,1607.28 ; L3.1@2666.41,1534.38 ccw(c2652.33,1548.46) 2672.24,1548.46 ccw(c2692.16,1548.46) L3.1@2678.08,1534.38 ; L3.1@2672.24,1528.54 U2.1@2672.24,1597.6 ; 2672.24,1579.86 cw(c2707.7,1579.86) U2.1@2682.63,1604.93 ; F1.2@2798.23,1573.82 2798.23,1607.28 ; C8.1@2799.74,1658.99 cw(c2777.26,1636.51) 2809.06,1636.51 cw(c2840.85,1636.51) C8.1@2818.37,1658.99 ; C8.1@2799.74,1672.77 ccw(c2777.26,1650.29) 2777.26,1682.09 ccw(c2777.26,1713.88) C8.1@2799.74,1691.4 ; F1.2@2800.02,1586.35 ccw(c2780.3,1607.28) 2809.06,1607.28 ; F1.2@2809.06,1562.99 2809.06,1607.28 ; F1.2@2812.16,1589.57 cw(c2816.45,1607.28) 2798.23,1607.28 ; F1.2@2818.09,1586.35 cw(c2837.81,1607.28) 2809.06,1607.28 ; 2798.23,1607.28 2809.06,1607.28
  Bottom Layer w10: BT1.4@1954.72,415.55 2173.43,415.55 2187.99,430.12 2187.99,640.75 2200.79,653.54 2527.56,653.54 2538.39,664.37 v1(2538.39,726.38) C22.2@2538.39,761.81 ; BT1.4@1965,405.28 cw(c1989.8,380.48) 1989.8,415.55 cw(c1989.8,450.62) BT1.4@1965,425.82 ; BT1.4@1972.07,398.21 cw(c2013.94,356.34) 2013.94,415.55 cw(c2013.94,474.77) BT1.4@1972.07,432.89 ; C22.2@2529.8,753.23 cw(c2509.08,732.5) v1@2538.39,732.5 ; C22.2@2530.9,773.32 ccw(c2520.97,786.42) v2@2537.4,786.42 ; C22.2@2534.26,774.71 cw(c2550.03,770.48) v2@2542.59,785.01 ; v1@2535.85,727.84 ccw(c2525.03,734.09) 2537.09,737.32 ; C22.2@2537.4,762.8 v2@2537.4,786.42 ; C22.2@2537.4,770.41 cw(c2559.32,770.41) v2@2543.82,785.9 ; 2538.39,737.25 cw(c2560.97,737.25) C22.2@2545,753.23 ; 2539.07,804.3 ccw(c2555.29,804.3) v2@2543.82,792.84 ; C22.2@2543.9,773.32 cw(c2553.84,786.42) v2@2537.4,786.42 ; v6@2804.2,1481.36 cw(c2792.47,1469.63) 2809.06,1469.63 cw(c2825.64,1469.63) v6@2813.91,1481.36 ; 2809.06,1451.77 v6(2809.06,1486.22) ; v2@3008.36,590.24 cw(c3014.27,579.99) 3017.34,591.43 cw(c3020.4,602.85) v2@3010.15,596.94 ; v2@3009.37,591.02 cw(c3017.74,582.65) 3017.74,594.49 cw(c3017.74,606.32) v2@3009.37,597.95 ; v2@3014.53,822.47 ccw(c3004.82,832.18) 3018.56,832.18 ; 3018.56,829.48 ccw(c3028.48,829.48) 3021.47,822.47 ccw(c3030.93,831.93) 3030.93,818.54 ; v2@3019.58,819 3018.56,820.02 3018.56,1407.62 2975.39,1450.79 2563.98,1450.79 2539.07,1425.88 2539.07,790.65 v2(2540.35,789.37) v2@2537.4,786.42 ; v2@3021.3,818.54 C34.2@3055.28,818.54 R24.1@3055.28,588.74 ; v2@3021.47,815.53 cw(c3028.73,808.27) 3028.73,818.54 ; R24.1@3030.8,582.1 ccw(c3005.91,563.29) v2(3005.91,594.49) R24.1@3035.43,594.49 ; R24.1@3035.71,596.18 ccw(c2988.46,643.43) 3055.28,643.43 ; R24.1@3041.34,588.58 R23.1@3096.46,588.58 R22.1@3149.61,588.58 ; R24.1@3042.78,589.11 ccw(c3012.61,619.28) 3055.28,619.28 ; C34.2@3047.68,808.98 cw(c3029.33,790.63) 3055.28,790.63 cw(c3081.22,790.63) C34.2@3062.88,808.98 ; C34.2@3047.68,810.94 ccw(c3029.33,792.6) 3029.33,818.54 ccw(c3029.33,844.49) C34.2@3047.68,826.14 ; R24.1@3050.91,580.98 cw(c3069.26,562.63) 3069.26,588.58 cw(c3069.26,614.53) R24.1@3050.91,596.18 ; R23.1@3086.89,580.98 ccw(c3068.54,562.63) 3068.54,588.58 ccw(c3068.54,614.53) R23.1@3086.89,596.18 ; R23.1@3106.03,580.98 cw(c3124.37,562.63) 3124.37,588.58 cw(c3124.37,614.53) R23.1@3106.03,596.18 ; R22.1@3140.04,580.98 ccw(c3121.69,562.63) 3121.69,588.58 ccw(c3121.69,614.53) R22.1@3140.04,596.18
  other v2: 3018,819
50MHZ: U1.M12 XTAL1.3 | length 141.8
  Top Layer w15: U1.M12@1740.16,1153.54 1783.46,1153.54 1800.22,1170.3 XTAL1.3@1800.22,1245.07
AD0: U1.A2 U3.J6 U4.B6 | length 2848.1
  Top Layer w4: U4.B6@432.09,893.93 cw(c432.09,884.98) 438.42,891.31 cw(c444.75,897.64) U4.B6@435.8,897.64 ; U4.B6@432.09,897.64 446.85,882.87 v1(446.85,877.95) ; U4.B6@433.24,896.49 cw(c414.7,877.95) v1@440.91,877.95 ; 440.06,889.66 cw(c428.36,877.95) v1@444.91,877.95 ; v1(504.92,645.67) 518.39,645.67 ; v1@509.3,641.66 cw(c518.39,633.36) 518.39,645.67 ; v1@509.3,649.67 ccw(c518.39,657.98) 518.39,645.67 ; U3.J6@824.87,843.58 cw(c813.17,831.87) 829.72,831.87 cw(c846.28,831.87) U3.J6@834.57,843.58 ; v1@825.53,641.47 ccw(c815.39,631.34) 815.39,645.67 ccw(c815.39,660) v1@825.53,649.87 ; v1@825.53,831.95 ccw(c815.39,842.09) 829.72,842.09 ccw(c844.06,842.09) v1@833.92,831.95 ; v1@826.02,832.4 ccw(c822.44,836.88) 827.98,838.37 ccw(c835.95,840.5) v1@832.33,833.09 ; v1@827.12,833.09 ccw(c823.5,840.5) 831.47,838.37 ccw(c837.01,836.88) v1@833.43,832.4 ; v1(829.72,645.67) 734.39,645.67 734.39,636.57 cw(c733.49,636.57) 733.49,635.67 726.29,635.67 cw(c726.29,636.57) 725.39,636.57 725.39,654.77 ccw(c724.49,654.77) 724.49,655.67 717.29,655.67 ccw(c717.29,654.77) 716.39,654.77 716.39,636.57 cw(c715.49,636.57) 715.49,635.67 708.29,635.67 cw(c708.29,636.57) 707.39,636.57 707.39,654.77 ccw(c706.49,654.77) 706.49,655.67 699.29,655.67 ccw(c699.29,654.77) 698.39,654.77 698.39,636.57 cw(c697.49,636.57) 697.49,635.67 690.29,635.67 cw(c690.29,636.57) 689.39,636.57 689.39,654.77 ccw(c688.49,654.77) 688.49,655.67 681.29,655.67 ccw(c681.29,654.77) 680.39,654.77 680.39,636.57 cw(c679.49,636.57) 679.49,635.67 672.29,635.67 cw(c672.29,636.57) 671.39,636.57 671.39,654.77 ccw(c670.49,654.77) 670.49,655.67 663.29,655.67 ccw(c663.29,654.77) 662.39,654.77 662.39,636.57 cw(c661.49,636.57) 661.49,635.67 654.29,635.67 cw(c654.29,636.57) 653.39,636.57 653.39,654.77 ccw(c652.49,654.77) 652.49,655.67 645.29,655.67 ccw(c645.29,654.77) 644.39,654.77 644.39,636.57 cw(c643.49,636.57) 643.49,635.67 636.29,635.67 cw(c636.29,636.57) 635.39,636.57 635.39,654.77 ccw(c634.49,654.77) 634.49,655.67 627.29,655.67 ccw(c627.29,654.77) 626.39,654.77 626.39,636.57 cw(c625.49,636.57) 625.49,635.67 618.29,635.67 cw(c618.29,636.57) 617.39,636.57 617.39,654.77 ccw(c616.49,654.77) 616.49,655.67 609.29,655.67 ccw(c609.29,654.77) 608.39,654.77 608.39,636.57 cw(c607.49,636.57) 607.49,635.67 600.29,635.67 cw(c600.29,636.57) 599.39,636.57 599.39,654.77 ccw(c598.49,654.77) 598.49,655.67 591.29,655.67 ccw(c591.29,654.77) 590.39,654.77 590.39,636.57 cw(c589.49,636.57) 589.49,635.67 582.29,635.67 cw(c582.29,636.57) 581.39,636.57 581.39,654.77 ccw(c580.49,654.77) 580.49,655.67 573.29,655.67 ccw(c573.29,654.77) 572.39,654.77 572.39,636.57 cw(c571.49,636.57) 571.49,635.67 564.29,635.67 cw(c564.29,636.57) 563.39,636.57 563.39,654.77 ccw(c562.49,654.77) 562.49,655.67 555.29,655.67 ccw(c555.29,654.77) 554.39,654.77 554.39,636.57 cw(c553.49,636.57) 553.49,635.67 546.29,635.67 cw(c546.29,636.57) 545.39,636.57 545.39,654.77 ccw(c544.49,654.77) 544.49,655.67 537.29,655.67 ccw(c537.29,654.77) 536.39,654.77 536.39,636.57 cw(c535.49,636.57) 535.49,635.67 528.29,635.67 cw(c528.29,636.57) 527.39,636.57 527.39,654.77 ccw(c526.49,654.77) 526.49,655.67 519.29,655.67 ccw(c519.29,654.77) 518.39,654.77 518.39,645.67 ; v1(829.72,827.76) U3.J6@829.72,848.43 ; v1@1278,745.93 ccw(c1278,760.26) 1288.13,750.13 ccw(c1298.26,740) v1@1283.93,740 ; v1@1279.54,745.73 ccw(c1283.19,759.37) 1290.25,747.14 ; v1@1279.89,739.58 cw(c1291.49,737.01) 1285.1,747.04 ; v1@1283.67,741.76 cw(c1288.43,743.24) 1285.75,747.45 ; v1@1283.73,738.46 cw(c1297.76,734.71) 1290.5,747.28 ; v1@1283.79,738.72 cw(c1304.83,734.06) 1293.25,752.23 ; 1284.92,746.92 cw(c1306.84,725) U1.A2@1307.06,756 ; 1291.68,753.68 cw(c1306.94,738.43) U1.A2@1307.09,760 ; U1.A2@1307.03,752 ccw(c1306.75,711.57) 1278.16,740.16 1297.84,759.84 U1.A2@1307.09,759.84 ; v1@1279.28,745.79 ccw(c1280.82,752.73) 1284.63,746.74 cw(c1280.82,752.73) v1@1279.28,745.79
  Bottom Layer w4: v1@442.65,873.75 cw(c432.52,863.62) 446.85,863.62 cw(c461.18,863.62) v1@451.05,873.75 ; v1(446.85,877.95) 446.85,744.09 480.32,710.63 480.32,656.5 491.14,645.67 ; v1@500.61,641.59 ccw(c491.14,632.65) 491.14,645.67 ; v1@500.61,649.75 cw(c491.14,658.69) 491.14,645.67 ; v1(504.92,645.67) 491.14,645.67 ; v1@825.53,649.87 ccw(c815.39,660) 829.72,660 ccw(c844.06,660) 833.92,649.87 ccw(c844.06,660) 844.06,645.67 ccw(c844.06,631.34) v1@833.92,641.47 ; v1@825.53,823.56 cw(c815.39,813.42) 829.72,813.42 cw(c844.06,813.42) v1@833.92,823.56 ; v1(829.72,827.76) v1(829.72,645.67) 867.6,645.67 cw(c867.6,644.77) 868.5,644.77 868.5,631.57 ccw(c869.4,631.57) 869.4,630.67 876.6,630.67 ccw(c876.6,631.57) 877.5,631.57 877.5,658.42 cw(c878.4,658.42) 878.4,659.32 885.6,659.32 cw(c885.6,658.42) 886.5,658.42 886.5,631.57 ccw(c887.4,631.57) 887.4,630.67 894.6,630.67 ccw(c894.6,631.57) 895.5,631.57 895.5,658.42 cw(c896.4,658.42) 896.4,659.32 903.6,659.32 cw(c903.6,658.42) 904.5,658.42 904.5,631.57 ccw(c905.4,631.57) 905.4,630.67 912.6,630.67 ccw(c912.6,631.57) 913.5,631.57 913.5,658.42 cw(c914.4,658.42) 914.4,659.32 921.6,659.32 cw(c921.6,658.42) 922.5,658.42 922.5,631.57 ccw(c923.4,631.57) 923.4,630.67 930.6,630.67 ccw(c930.6,631.57) 931.5,631.57 931.5,658.42 cw(c932.4,658.42) 932.4,659.32 939.6,659.32 cw(c939.6,658.42) 940.5,658.42 940.5,631.57 ccw(c941.4,631.57) 941.4,630.67 948.6,630.67 ccw(c948.6,631.57) 949.5,631.57 949.5,658.42 cw(c950.4,658.42) 950.4,659.32 957.6,659.32 cw(c957.6,658.42) 958.5,658.42 958.5,631.57 ccw(c959.4,631.57) 959.4,630.67 966.6,630.67 ccw(c966.6,631.57) 967.5,631.57 967.5,658.42 cw(c968.4,658.42) 968.4,659.32 975.6,659.32 cw(c975.6,658.42) 976.5,658.42 976.5,631.57 ccw(c977.4,631.57) 977.4,630.67 984.6,630.67 ccw(c984.6,631.57) 985.5,631.57 985.5,658.42 cw(c986.4,658.42) 986.4,659.32 993.6,659.32 cw(c993.6,658.42) 994.5,658.42 994.5,631.57 ccw(c995.4,631.57) 995.4,630.67 1002.6,630.67 ccw(c1002.6,631.57) 1003.5,631.57 1003.5,658.42 cw(c1004.4,658.42) 1004.4,659.32 1011.6,659.32 cw(c1011.6,658.42) 1012.5,658.42 1012.5,631.57 ccw(c1013.4,631.57) 1013.4,630.67 1020.6,630.67 ccw(c1020.6,631.57) 1021.5,631.57 1021.5,658.42 cw(c1022.4,658.42) 1022.4,659.32 1029.6,659.32 cw(c1029.6,658.42) 1030.5,658.42 1030.5,631.57 ccw(c1031.4,631.57) 1031.4,630.67 1038.6,630.67 ccw(c1038.6,631.57) 1039.5,631.57 1039.5,644.5 1040.67,645.67 1271.67,645.67 1278,652 v1(1278,740) ; v1@1273.8,735.8 cw(c1263.68,725.68) 1278,725.68 cw(c1292.32,725.68) v1@1282.2,735.8
AD1: U1.A3 U3.H6 U4.C5 | length 2713.5
  Top Layer w4: U4.C5@402.56,923.46 cw(c402.56,914.5) 408.89,920.83 cw(c415.22,927.17) U4.C5@406.27,927.17 ; U4.C5@402.56,927.17 v1(417.32,912.4) ; v1@411.39,912.4 ccw(c397.05,912.4) 407.19,922.54 ccw(c417.32,932.67) v1@417.32,918.34 ; v1(465.55,667.32) 589.06,667.32 ccw(c589.06,668.22) 589.96,668.22 589.96,676.42 cw(c590.86,676.42) 590.86,677.32 598.06,677.32 cw(c598.06,676.42) 598.96,676.42 598.96,668.22 ccw(c599.86,668.22) 599.86,667.32 607.06,667.32 ccw(c607.06,668.22) 607.96,668.22 607.96,676.42 cw(c608.86,676.42) 608.86,677.32 616.06,677.32 cw(c616.06,676.42) 616.96,676.42 616.96,668.22 ccw(c617.86,668.22) 617.86,667.32 625.06,667.32 ccw(c625.06,668.22) 625.96,668.22 625.96,676.42 cw(c626.86,676.42) 626.86,677.32 634.06,677.32 cw(c634.06,676.42) 634.96,676.42 634.96,668.22 ccw(c635.86,668.22) 635.86,667.32 643.06,667.32 ccw(c643.06,668.22) 643.96,668.22 643.96,676.42 cw(c644.86,676.42) 644.86,677.32 652.06,677.32 cw(c652.06,676.42) 652.96,676.42 652.96,668.22 ccw(c653.86,668.22) 653.86,667.32 661.06,667.32 ccw(c661.06,668.22) 661.96,668.22 661.96,676.42 cw(c662.86,676.42) 662.86,677.32 670.06,677.32 cw(c670.06,676.42) 670.96,676.42 670.96,668.22 ccw(c671.86,668.22) 671.86,667.32 679.06,667.32 ccw(c679.06,668.22) 679.96,668.22 679.96,676.42 cw(c680.86,676.42) 680.86,677.32 688.06,677.32 cw(c688.06,676.42) 688.96,676.42 688.96,668.22 ccw(c689.86,668.22) 689.86,667.32 697.06,667.32 ccw(c697.06,668.22) 697.96,668.22 697.96,676.42 cw(c698.86,676.42) 698.86,677.32 706.06,677.32 cw(c706.06,676.42) 706.96,676.42 706.96,668.22 ccw(c707.86,668.22) 707.86,667.32 715.06,667.32 ccw(c715.06,668.22) 715.96,668.22 715.96,676.42 cw(c716.86,676.42) 716.86,677.32 724.06,677.32 cw(c724.06,676.42) 724.96,676.42 724.96,668.22 ccw(c725.86,668.22) 725.86,667.32 733.06,667.32 ccw(c733.06,668.22) 733.96,668.22 733.96,676.42 cw(c734.86,676.42) 734.86,677.32 742.06,677.32 cw(c742.06,676.42) 742.96,676.42 742.96,658.22 ccw(c743.86,658.22) 743.86,657.32 751.06,657.32 ccw(c751.06,658.22) 751.96,658.22 751.96,676.42 cw(c752.86,676.42) 752.86,677.32 760.06,677.32 cw(c760.06,676.42) 760.96,676.42 760.96,658.22 ccw(c761.86,658.22) 761.86,657.32 769.06,657.32 ccw(c769.06,658.22) 769.96,658.22 769.96,676.42 cw(c770.86,676.42) 770.86,677.32 778.06,677.32 cw(c778.06,676.42) 778.96,676.42 778.96,658.22 ccw(c779.86,658.22) 779.86,657.32 787.06,657.32 ccw(c787.06,658.22) 787.96,658.22 787.96,676.42 cw(c788.86,676.42) 788.86,677.32 796.06,677.32 cw(c796.06,676.42) 796.96,676.42 796.96,658.22 ccw(c797.86,658.22) 797.86,657.32 805.06,657.32 ccw(c805.06,658.22) 805.96,658.22 805.96,676.42 cw(c806.86,676.42) 806.86,677.32 814.06,677.32 cw(c814.06,676.42) 814.96,676.42 814.96,658.92 ccw(c815.86,658.92) 815.86,658.02 823.06,658.02 ccw(c823.06,658.92) 823.96,658.92 823.96,676.42 cw(c824.86,676.42) 824.86,677.32 832.06,677.32 cw(c832.06,676.42) 832.96,676.42 832.96,659.92 ccw(c833.86,659.92) 833.86,659.02 841.06,659.02 ccw(c841.06,659.92) 841.96,659.92 841.96,666.42 cw(c842.86,666.42) 842.86,667.32 ; v1@469.75,663.12 cw(c479.88,652.99) 479.88,667.32 cw(c479.88,681.66) v1@469.75,671.52 ; U3.H6@829.72,879.92 v1(855.32,879.92) ; U3.H6@834.57,875.07 cw(c846.28,863.36) 846.28,879.92 cw(c846.28,896.48) U3.H6@834.57,884.77 ; v1@851.12,875.72 ccw(c840.98,865.59) 840.98,879.92 ccw(c840.98,894.25) v1@851.12,884.12 ; v1@851.91,663.32 ccw(c842.86,655.07) 842.86,667.32 ; v1@851.91,671.32 cw(c842.86,679.57) 842.86,667.32 ; v1(856.3,667.32) 842.86,667.32 ; v1(1268,794) 1280,794 ; v1@1272.71,790.4 cw(c1280,784.83) 1280,794 ; v1@1272.71,797.6 ccw(c1280,803.17) 1280,794 ; U1.A3@1301.54,793.67 ccw(c1288.15,780.28) 1288.15,799.21 ccw(c1288.15,818.15) U1.A3@1301.54,804.76 ; U1.A3@1307.09,799.21 1285.21,799.21 1280,794
  Bottom Layer w4: v1@417.32,906.46 cw(c417.32,892.13) 427.46,902.27 cw(c437.59,912.4) v1@423.26,912.4 ; v1(417.32,912.4) 430.12,899.61 430.12,738.19 442.91,725.39 442.91,689.96 v1(465.55,667.32) ; v1@459.61,667.32 ccw(c445.28,667.32) 455.42,677.46 ccw(c465.55,687.59) v1@465.55,673.26 ; v1@851.12,875.72 cw(c838.61,863.21) 856.3,863.21 ; v1@852.1,671.52 ccw(c841.97,681.66) 856.3,681.66 ccw(c870.63,681.66) 860.5,671.52 ccw(c870.63,681.66) 870.63,667.32 ccw(c870.63,652.99) v1@860.5,663.12 ; v1(855.32,879.92) 856.3,879.92 v1(856.3,667.32) 1160.5,667.32 1160.5,653.67 1169.5,653.67 1169.5,680.98 1178.5,680.98 1178.5,653.67 1187.5,653.67 1187.5,680.98 1196.5,680.98 1196.5,653.67 1205.5,653.67 1205.5,680.98 1214.5,680.98 1214.5,653.67 1223.5,653.67 1223.5,667.32 1245.32,667.32 1247,669 1247,679.5 1232.2,679.5 1232.2,688.5 1262,688.5 1262,697.5 1233,697.5 1233,706.5 1262,706.5 1262,715.5 1233,715.5 1233,724.5 1262,724.5 1262,733.5 1233,733.5 1233,742.5 1262,742.5 1262,751.5 1233,751.5 1233,760.5 1262,760.5 1262,769.5 1233,769.5 1233,778.5 1260.49,778.5 1260.49,787.5 1247,787.5 1247,792 1249,794 v1(1268,794) ; 856.3,867.96 cw(c867.27,867.96) v1@859.51,875.72 ; v1@1263.8,789.8 ccw(c1253.68,779.68) 1253.68,794 ccw(c1253.68,808.32) v1@1263.8,798.2